# EAGLE board simple (EAGLE 9.0.0)
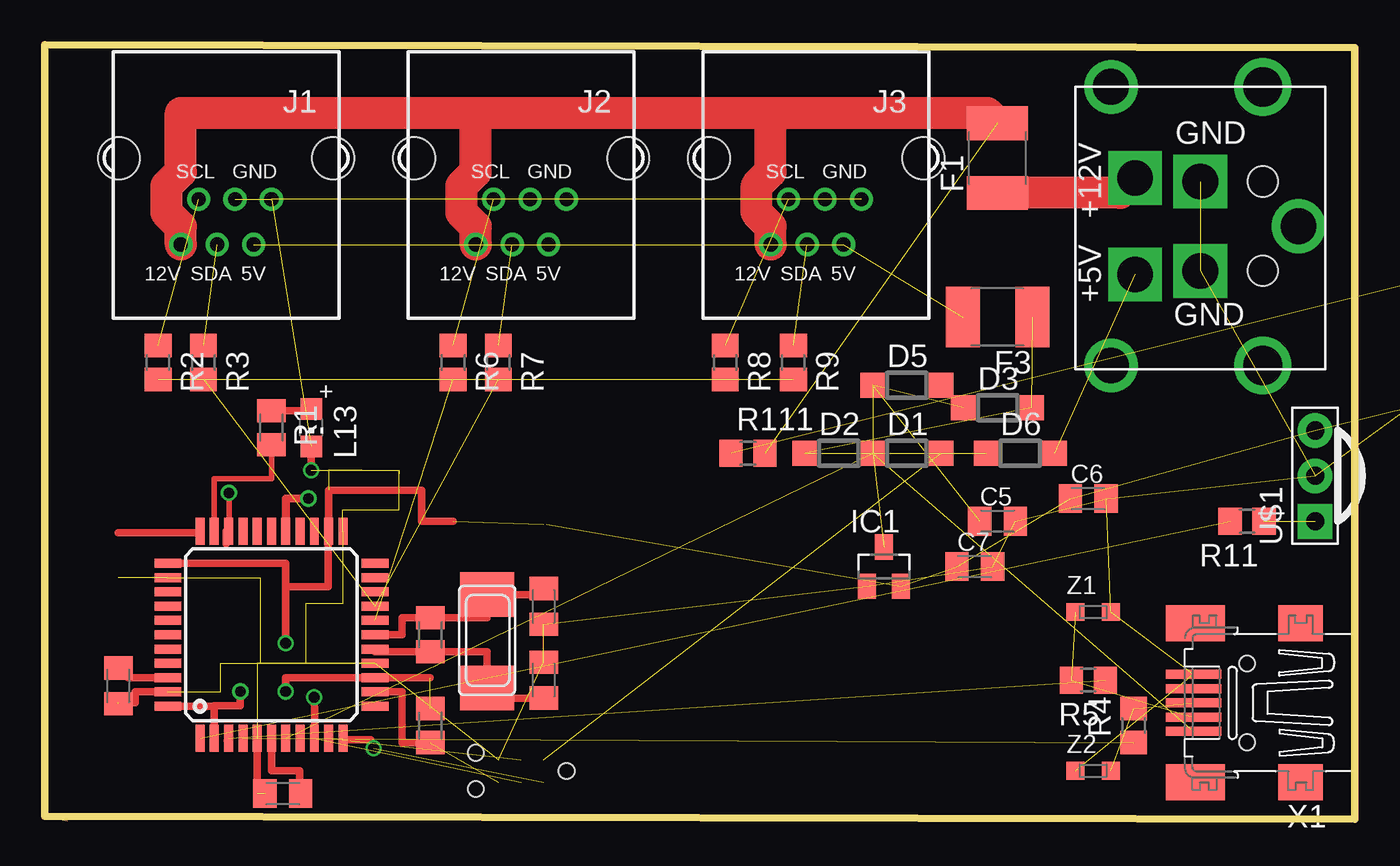
[diagram p0: board, top side]
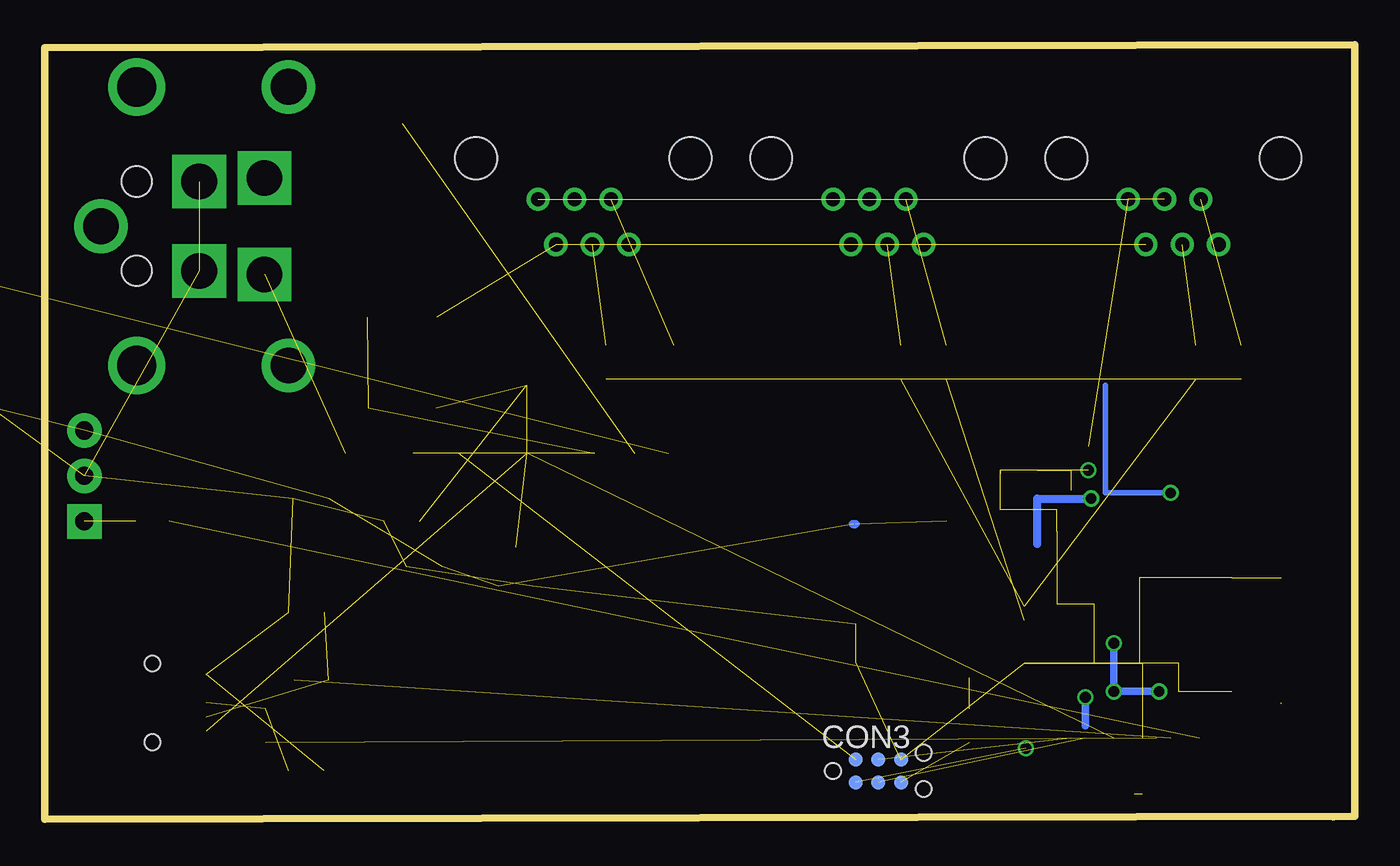
[diagram p1: board, bottom side, seen from below]

Size 73.34 x 43.43 mm. Coordinates in mm from the lower left corner, seen from the top.
Outline: 0,0.25 1.27,0
Outline: 0,0.25 73.34,0.1 73.34,43.27 0,43.43 0,0.25
Copper layers (1*16): Top 0.035mm / dielectric 1.5mm / Bottom 0.035mm
Design rules "Fusion_eagle_rule_v1.1": minimum track width 6mil, minimum drill 12mil, track to track 6mil, track to pad 6mil, pad to pad 6mil, via to via 6mil, smd to smd 0mil, copper to edge 10mil, drill to drill 10mil, minimum pad ring 10mil, minimum via ring 6mil, stop-mask expansion 2mil, vias tented up to drill 100mil, thermal gap 10mil
Net classes: 0 default: width 0.406 mm, clearance 0.25 mm; 1 power: width 0.254 mm; 2 VIN: width 0.254 mm; 3 fine: width 0.254 mm; 4 aref: width 0.254 mm; 5 USBA: width 0.254 mm, clearance 0.254 mm; 6 USBB: width 0.254 mm, clearance 0.254 mm

## Footprints (pad centres in the part's own frame; a part is rotated, then mirrored left to right if it is on the bottom)
CHIP-LED0805 = smd 1.2 x 1.2: A 0,-1.05; C 0,1.05
C0805K = smd 1.3 x 1.6: 1 -1,0; 2 1,0
TC2030-MCP-NL = smd 0.787 x 0.787: 5V 1.27,0.635; GND 3.81,0.635; MISO 1.27,-0.635; MOSI 2.54,0.635; RESET 3.81,-0.635; SCK 2.54,-0.635 | hole 0.889: 0,0; 5.08,-1.016; 5.08,1.016
SOD123 = smd 1.4 x 1.4: A 1.9,0; C -1.9,0
C1812 = smd 1.9 x 3.4: 1 -1.95,0; 2 1.95,0
SOT23 = smd 1 x 1.4: 1 -0.95,-1.1; 2 0.95,-1.1; 3 0,1.1
RJ12-RIGHTANGLE-I2C = drill 0.8 pad 1.3: +5V -1.54,4.84; +12V 2.54,4.84; GND1 -2.54,2.3; GND2 -0.5,2.3; SCL 1.54,2.3; SDA 0.5,4.84 | hole 2.36: -6,0; 6,0
M0805 = smd 1.3 x 1.6: 1 -0.95,0; 2 0.95,0
R0805 = smd 1.3 x 1.5: 1 -0.95,0; 2 0.95,0
PNA460XM = drill 1.016 pad 1.93 square: 1 -2.54,0 | drill 1.016 pad 1.93: 2 0,0; 3 2.54,0
TQFP44 = smd 1.5 x 0.5: 1 -5.8,4; 2 -5.8,3.2; 3 -5.8,2.4; 4 -5.8,1.6; 5 -5.8,0.8; 6 -5.8,0; 7 -5.8,-0.8; 8 -5.8,-1.6; 9 -5.8,-2.4; 10 -5.8,-3.2; 11 -5.8,-4; 23 5.8,-4; 24 5.8,-3.2; 25 5.8,-2.4; 26 5.8,-1.6; 27 5.8,-0.8; 28 5.8,0; 29 5.8,0.8; 30 5.8,1.6; 31 5.8,2.4; 32 5.8,3.2; 33 5.8,4 | smd 0.5 x 1.5: 12 -4,-5.8; 13 -3.2,-5.8; 14 -2.4,-5.8; 15 -1.6,-5.8; 16 -0.8,-5.8; 17 0,-5.8; 18 0.8,-5.8; 19 1.6,-5.8; 20 2.4,-5.8; 21 3.2,-5.8; 22 4,-5.8; 34 4,5.8; 35 3.2,5.8; 36 2.4,5.8; 37 1.6,5.8; 38 0.8,5.8; 39 0,5.8; 40 -0.8,5.8; 41 -1.6,5.8; 42 -2.4,5.8; 43 -3.2,5.8; 44 -4,5.8
KPJX-4S-S = drill 2 square: +5V 2.7,1.35; +12V -2.7,1.35; GND1 -2.5,5; GND2 2.5,5 | drill 2: P$1 -7.8,0; P$2 7.8,0; P$11 0,10.5 | drill 2.2: P$3 -7.8,8.5; P$4 7.8,8.5 | hole 1.7: -2.5,8.5; 2.5,8.5
32005-201 = smd 3.1 x 0.5: 1 3,1.6; 2 3,0.8; 3 3,0; 4 3,-0.8; 5 3,-1.6 | smd 2.5 x 2: M1 -3,-4.45; M2 -3,4.45 | smd 3.3 x 2: M3 2.9,4.45; M4 2.9,-4.45 | hole 0.9: 0,2.2; 0,-2.2
NX6035 = smd 2.5 x 3: P$1 2.665,0; P$2 -2.565,0
CT/CN0603 = smd 1 x 1: 1 -1,0; 2 1,0

## Placement (x,y rotation side)
5V-OK1  RED  [CHIP-LED0805]  81.28,25.65 0 top  (outside the outline)
C2  22pF  [C0805K]  27.94,7.87 270 top
C3  100nF  [C0805K]  13.33,1.52 0 top
C5  10u  [C0805K]  53.34,16.76 0 top
C6  10u  [C0805K]  58.42,18.03 0 top
C7  100nF  [C0805K]  52.07,14.22 0 top
C8  22pF  [C0805K]  27.94,12 90 top
C11  100nF  [C0805K]  4.13,7.56 270 top
CON3  SPI  [TC2030-MCP-NL]  29.21,2.79 0 bottom
D1  Schottky  [SOD123]  48.26,20.57 0 top
D2  Schottky  [SOD123]  44.45,20.57 0 top
D3  Schottky  [SOD123]  53.34,23.11 0 top
D5  Schottky  [SOD123]  48.26,24.38 0 top
D6  Schottky  [SOD123]  54.61,20.57 0 top
F1  1.2A  [C1812]  53.34,37.08 90 top
F3  0.5A  [C1812]  53.34,28.19 180 top
IC1  MCP1703CB  [SOT23]  46.99,14.22 0 top
J1  RJ12RIGHTANGLE-I2C  [RJ12-RIGHTANGLE-I2C]  10.16,37.08 180 top
J2  RJ12RIGHTANGLE-I2C  [RJ12-RIGHTANGLE-I2C]  26.67,37.08 180 top
J3  RJ12RIGHTANGLE-I2C  [RJ12-RIGHTANGLE-I2C]  43.18,37.08 180 top
L13  RED  [CHIP-LED0805]  14.92,22 180 top
LED10  GREEN  [CHIP-LED0805]  80.01,32 0 top  (outside the outline)
R1  1k  [M0805]  12.7,22 270 top
R2  100  [R0805]  6.35,25.65 270 top
R3  100  [R0805]  8.89,25.65 270 top
R4  22  [R0805]  60.96,5.33 90 top
R5  22  [R0805]  58.42,7.87 180 top
R6  100  [R0805]  22.86,25.65 270 top
R7  100  [R0805]  25.4,25.65 270 top
R8  100  [R0805]  38.1,25.65 270 top
R9  100  [R0805]  41.91,25.65 270 top
R11  1K  [R0805]  67.31,16.76 180 top
R13  1M  [M0805]  21.59,10.41 90 top
R15  10k  [M0805]  21.59,5.33 90 top
R31  10K  [R0805]  87.63,25.65 0 top  (outside the outline)
R111  10k  [R0805]  39.37,20.57 0 top
U$1  TSOP4838  [PNA460XM]  71.12,19.3 90 top
U$4  32U4  [TQFP44]  12.7,10.41 90 top
U$6  KPJX-4S-S  [KPJX-4S-S]  59.69,33.27 270 top
X1  MINI-USB  [32005-201]  67.31,6.6 180 top
X3  8MHz  [NX6035]  24.77,10.1 270 top
Z1  VARISTOR  [CT/CN0603]  58.69,11.68 0 top
Z2  VARISTOR  [CT/CN0603]  58.69,2.79 0 top

## Library data of the parts
5V-OK1 L13 LED10 U$1 U$4 = adafruit
C2 C3 C8 C11 R13 R111 = rcl
C5 C6 = rcl; ELECROW: C15850; LCSC: C15850; MPN: 77-VJ1206V106ZXQTBC; SPICEPREFIX: C
C7 = rcl; ELECROW: C49678; LCSC: C49678; MPN: 80-C1206C104K5R; SPICEPREFIX: C
CON3 F1 F3 J1-J3 U$6 X3 = lpatiny
D1-D3 D5 D6 = diode; LCSC: C82544; MPN: 621-1N5819HW-F
IC1 = linear; LCSC: C53352
R1-R3 R6-R9 R11 R15 R31 = resistor
R4 = rcl; ELECROW: C17561; LCSC: C17561
R5 = rcl; ELECROW: C17561; LCSC: C17561; SPICEPREFIX: R
X1 = con-cypressindustries; LCSC: C46391; MPN: 649-10033526-N3212LF
Z1 Z2 = varistor

## Nets
+3.3 [fine]: C6.1 C7.1 IC1.2 R15.2 R31.1 U$1.3 U$4.2 U$4.14 U$4.24 U$4.34 U$4.44
+5V [fine]: F3.2 J1.+5V J2.+5V J3.+5V
+12V [power]: F1.2 J1.+12V J2.+12V J3.+12V R111.2
+XV: C5.1 D1.C D3.C D5.C IC1.3
A0: U$4.36
A1: U$4.37
A2: U$4.38
A3: U$4.39
A4: U$4.40
A5: U$4.41
AREF: C11.1 U$4.42
CS: U$4.25
D5: U$4.31
D6: U$4.27
D7: R11.2 U$4.1
D8: U$4.28
D9: U$4.29
D10: U$4.30
D11: U$4.12
D12: U$4.26
D13: R1.2 U$4.32
GND [power]: 5V-OK1.C C2.1 C3.1 C5.2 C6.2 C7.2 C8.1 C11.2 CON3.GND IC1.1 J1.GND1 J1.GND2 J2.GND1 J2.GND2 J3.GND1 J3.GND2 L13.C LED10.C U$1.2 U$4.5 U$4.15 U$4.23 U$4.35 U$4.43 U$6.GND1 U$6.GND2 X1.5 Z1.2 Z2.1
HWB: U$4.33
MISO: CON3.MISO U$4.11
MOSI: CON3.MOSI U$4.10
N$1: J2.SCL R6.1
N$2: J1.SCL R2.1
N$3: J1.SDA R3.1
N$4: L13.A R1.1
N$5: D2.C D3.A D6.C F3.1
N$6: J2.SDA R7.1
N$7: J3.SCL R8.1
N$8: J3.SDA R9.1
N$9: R11.1 U$1.1
N$10: 5V-OK1.A R31.2
N$16: C3.2 U$4.6
N$39: F1.1 U$6.+12V
N$42: C8.2 R13.2 U$4.17 X3.P$2
N$75: LED10.A R111.1
PWR-5V: D6.A U$6.+5V
RD+ [USBB]: R4.1 U$4.4
RD- [USBB]: R5.1 U$4.3
RESET: CON3.RESET R15.1 U$4.13
RX: U$4.20
RXLED: U$4.8
SCK: CON3.SCK U$4.9
SCL: R2.2 R6.2 R8.2 U$4.18
SDA: R3.2 R7.2 R9.2 U$4.19
TX: U$4.21
TXLED: U$4.22
USBC_N: R5.2 X1.2 Z1.1
USBC_P: R4.2 X1.3 Z2.2
VCC-FTDI: D5.A
VCC-ICSP: CON3.5V D1.A
VUSB: D2.A U$4.7 X1.1
XTAL1: C2.2 R13.1 U$4.16 X3.P$1

## Tracks (layer width: path | path; a pad name or v marks a point on that pad's centre or on a via)
+3.3  (via drill 0.6)  (9 unrouted)
  Top 0.406: U$4.44 9.5,6.41 | 9.5,6.41 U$4.2 | U$4.14 13.5,8.01 | U$4.14 13.49,8.01 v13.49,7.24 | v10.95,7.24 10.95,6.45 9.5,6.45 9.5,6.41 | 13.49,13.11 15.88,13.11 15.88,16.21 U$4.24 15.9,18.51 21.11,18.51 21.11,16.76 22.86,16.76 | 13.49,13.11 v13.49,9.94 | U$4.34 13.49,14.41 13.49,13.11 | U$4.14 21.59,8.01
  Bottom 0.406: v10.95,7.24 v13.49,7.24 v13.49,9.94
  Bottom 0.457: 28.1,16.61 27.94,16.61
+5V  (3 unrouted)
+12V  (1 unrouted)
  Top 1.778: J1.+12V 7.62,33.25 6.83,34.04 6.83,35.53 7.62,36.32 7.62,39.62 24.13,39.62 | 24.13,39.62 40.64,39.62 | 40.64,39.62 52.75,39.62 F1.2 | J2.+12V 24.13,33.25 23.34,34.04 23.34,35.53 24.13,36.32 24.13,39.62 | J3.+12V 40.64,33.25 39.85,34.04 39.85,35.53 40.64,36.32 40.64,39.62
+XV  (4 unrouted)
AREF
  Top 0.406: U$4.42 4.67,8.01 C11.1
D5  (via drill 0.6)
  Top 0.305: U$4.31 10.32,16.21 v10.32,18.35
  Top 0.406: U$4.31 10.16,16.21 10.16,15.49
  Bottom 0.305: v10.32,18.35 13.97,18.35 13.97,24.38
D6  (via drill 0.6)
  Top 0.457: v14.76,18.03 13.5,18.03 | 13.49,18.03 13.5,18.03 | 13.5,18.03 U$4.27
  Bottom 0.457: 17.78,15.49 17.78,18.03 v14.76,18.03
D7  (1 unrouted)
D13
  Top 0.305: R1.2 12.7,19.14 9.5,19.14 U$4.32
GND  (via drill 0.6)  (42 unrouted)
  Top 0.406: 11.9,1.52 U$4.5 | 18.5,8.83 U$4.15 | U$4.43 5.08,7.21 5.08,6.6 4.13,6.6 | U$4.23 16.67,16.21 | L13.C v14.92,19.62
HWB
  Top 0.406: 4.13,16.13 8.7,16.13 U$4.33
MISO  (via drill 0.6)  (1 unrouted)
  Top 0.406: v18.41,4.06 18.26,4.06 18.26,4.54 16.7,4.54 U$4.11
MOSI  (1 unrouted)
N$1  (1 unrouted)
N$2  (1 unrouted)
N$3  (1 unrouted)
N$4
  Top 0.406: R1.1 14.82,22.95 L13.A
N$5  (3 unrouted)
N$6  (1 unrouted)
N$7  (1 unrouted)
N$8  (1 unrouted)
N$9  (1 unrouted)
N$10  (1 unrouted)
N$16
  Top 0.406: C3.2 14.29,1.52 14.29,2.79 12.7,2.79 U$4.6
N$39
  Top 1.778: U$6.+12V 60.2,35.13 F1.1
N$42
  Top 0.406: U$4.17 20,10.41 20,11.36 R13.2 24.77,11.36 X3.P$2 27.94,12.66 C8.2
N$75  (1 unrouted)
PWR-5V  (1 unrouted)
RD+  (1 unrouted)
  Top 0.305: 11.11,4.6 U$4.4
RD-  (1 unrouted)
  Top 0.305: 10.16,4.47 U$4.3
RESET  (1 unrouted)
  Top 0.406: U$4.13 20,7.21 20,4.38 R15.1 21.59,4.7
SCK  (via drill 0.6)  (1 unrouted)
  Top 0.406: v15.08,6.92 15.1,5.97 U$4.9
  Bottom 0.406: 15.08,5.33 v15.08,6.92
SCL  (3 unrouted)
SDA  (3 unrouted)
USBC_N  (2 unrouted)
USBC_P  (2 unrouted)
VCC-ICSP  (1 unrouted)
VUSB  (2 unrouted)
XTAL1
  Top 0.406: U$4.16 18.5,9.46 20,9.46 R13.1 24.77,9.46 X3.P$1 24.77,6.87 C2.2

## Text on the board
tDocu: D6
203bmp: C:/Users/G/Pictures/logo_epfl.bmp